# Altium PCB DCDC12180.PcbDoc
Units mm, origin at the board's own origin, x right, y up, seen from the top; angles counter-clockwise.
Board outline 50 x 25 mm, 2 copper layers (Top Layer, Bottom Layer); 19 components, 12 nets, 51 pads, 1 vias.
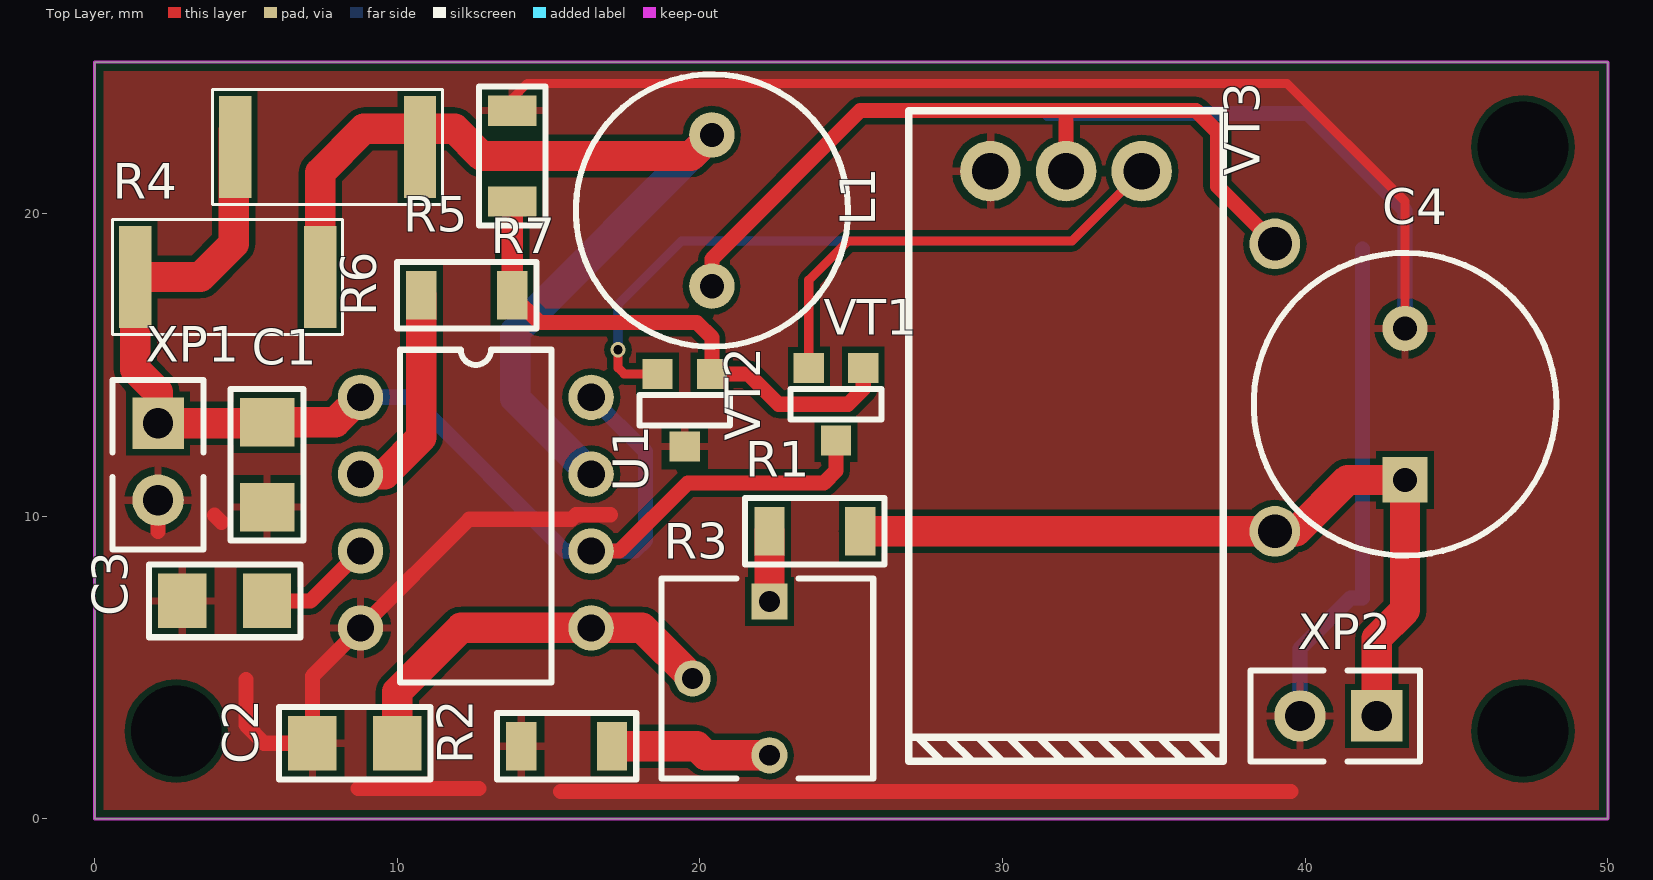
[diagram p0: Top Layer view]
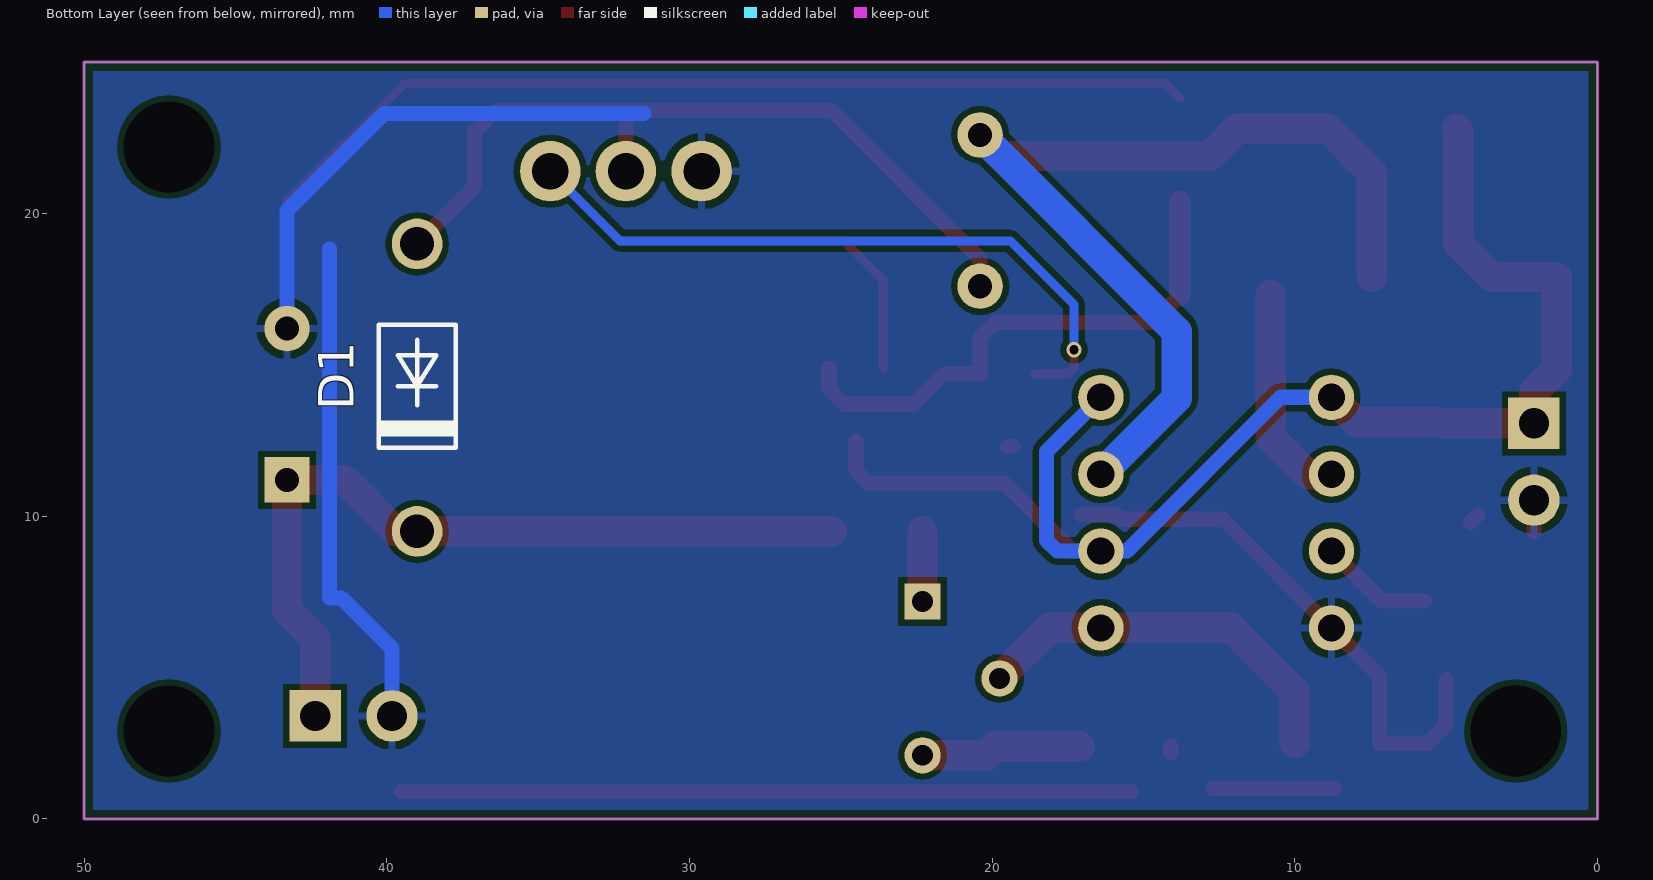
[diagram p1: Bottom Layer view, seen from below]
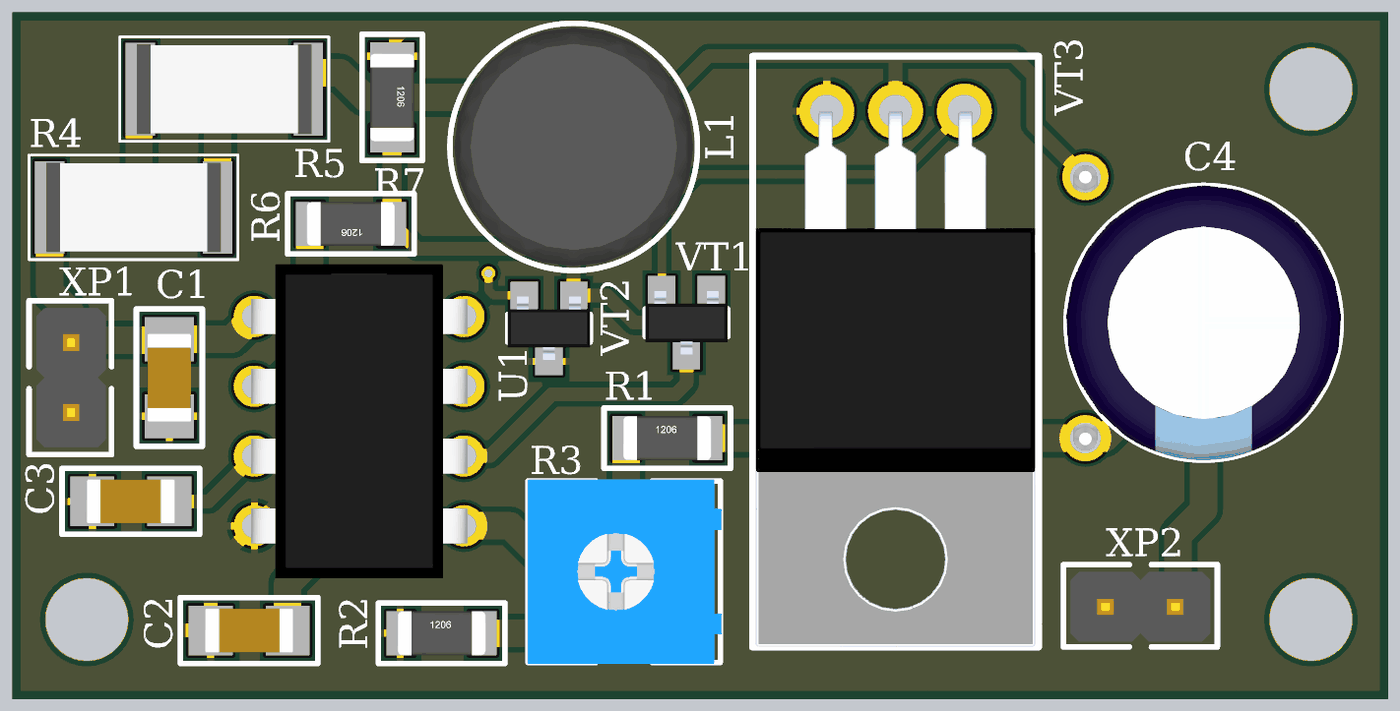
[diagram p2: 3D render of the assembled board from above, using the file's embedded part models]

## Layer stack, top to bottom
Top Solder: solder mask 0.0102, Solder Resist, Dk 3.5
Top Layer: signal copper 0.0356
Dielectric 1: dielectric 0.32, FR-4, Dk 4.8
Bottom Layer: signal copper 0.0356
Bottom Solder: solder mask 0.0102, Solder Resist, Dk 3.5

## Board outline
0,0 50,0 50,25 0,25

## Design rules (kind name [scope] priority, off if disabled: settings)
Clearance [All] p1: gap=0.2 ignorepadtopadclearanceinfootprint=FALSE except(0: Arc-Hole Track-Hole SMDPad-Hole THPad-Hole Via-Hole Fill-Hole Poly-Hole Region-Hole Text-Hole)
PolygonConnect [All] p1: connectstyle=Relief reliefconductorwidth=0.254 reliefentries=4 polygonreliefangle="90 Angle" airgapwidth=0.254
RoutingVias [All] p1: holewidth=0.3 width=0.5 viastyle="Through Hole" minholewidth=0.3 minwidth=0.5 maxholewidth=0.3 maxwidth=0.5
SolderMaskExpansion [All] p1: expansion=0.102
Width [All] p1: maxlimit=1 minlimit=0.2 preferedwidth=0.5
30 further rules are at their usual default settings.

## Components (designator, comment, footprint, x,y, rotation, side; value= is the part's Value field where it differs from the comment)
C1 "0.1u" C1206 5.7,11.7 r90 top
C2 "0.1u" C1206 8.6,2.5 r0 top
C3 "510p" C1206 4.3,7.2 r0 top
C4 "4.7u" ECAP-10x16-5 43.3,13.7 r270 top
D1 "HER107" DO-41 39,14.3 r90 bottom
L1 "100u" "INDUCTOR 0912" 20.4,20.1 r90 top
R1 "1M" R1206 23.8,9.5 r0 top
R2 "4.7k" R1206 15.6,2.4 r0 top
R3 "20k" 3362P 22.235,4.64 r270 top
R4 "0.5" R2512 4.4,17.9 r180 top
R5 "0.5" R2512 7.7,22.2 r180 top
R6 "330" R1206 12.3,17.3 r180 top
R7 "330" R1206 13.8,21.9 r270 top
U1 "MC34063AP1G" DIP8 12.6,10 r270 top
VT1 "BC847" SOT-23 24.5,13.7 r180 top
VT2 "BC857" SOT-23 19.5,13.5 r180 top
VT3 "IRF840" TO-220_HORIZONTAL 32.1,21.4 r180 top
XP1 "+12 В" 2_PIN_INPUT 2.1,11.8 r90 top value=Connector
XP2 "+180 В" 2_PIN_INPUT 41.1,3.4 r0 top value=Connector

## Footprints (in the part's own frame and the unit in brackets; to place one, negate y for a bottom-side part, rotate by r counter-clockwise, add the part's x,y. Pads: shape width x height; smd on the part's side, far side on the other; paste and mask are expansions set on the pad)
2_PIN_INPUT [mm]
  rect 1.7x1.7 hole 1: 1(1.27,0)
  round 1.7 hole 1: 2(-1.27,0)
  silkscreen extent -2.9,-1.5 2.7,1.5, body extent -2.64,-1.3 2.44,1.24, height 6.44
3362P [mm]
  rect 1.198x1.198 hole 0.69: 1(-2.54,0.065)
  round 1.198 hole 0.69: 2(0,-2.475) 3(2.54,0.065)
  silkscreen extent -3.3,-3.49 3.3,3.49, body extent -3.35,-3.5 3.35,3.54, height 5.34
C1206 [mm] "3216M"
  rect 1.6x1.8 smd: 1(-1.4,0) 2(1.4,0)
  silkscreen extent -2.5,-1.2 2.5,1.2, body extent -1.6,-0.8 1.6,0.8, height 1.01
DIP8 [mm]
  round 1.5 hole 0.9: 1(-3.93,-3.81) 2(-1.39,-3.81) 3(1.15,-3.81) 4(3.69,-3.81) 5(3.69,3.81) 6(1.15,3.81) 7(-1.39,3.81) 8(-3.93,3.81)
  silkscreen extent -5.5,-2.5 5.5,2.5, body extent -5.83,-3.94 5.6,3.94, height 4.19
DO-41 [mil]
  round 66 hole 44: A(185.03,-0.01) C(-188.98,0)
  silkscreen extent -80,-50 80,50, body extent -207,-53 202,53, height 111
ECAP-10x16-5 [mm]
  rect 1.5x1.5 hole 0.8: 1(2.5,0)
  round 1.5 hole 0.8: 2(-2.5,0)
  silkscreen extent -5,-5 5,5, body extent -5,-5 5,5, height 17.5
"INDUCTOR 0912" [mm]
  round 1.5 hole 0.8: 1(2.5,0) 2(-2.5,0)
  silkscreen extent -4.5,-4.5 4.5,4.5, body extent -4.35,-4.35 4.35,4.35, height 11
R1206 [mm]
  rect 1x1.6 smd: 1(-1.5,0) 2(1.5,0)
  silkscreen extent -2.3,-1.1 2.3,1.1, body extent -1.6,-0.8 1.6,0.8, height 1
R2512 [mm]
  rect 1.07x3.37 smd: 1(-3.055,0) 2(3.055,0)
  silkscreen extent -3.8,-1.9 3.8,1.9, body extent -3.17,-1.63 3.18,1.63, height 0.58
SOT-23 [mm]
  rect 1x1 smd: 1(-0.9,-1.2) 2(0.9,-1.2) 3(0,1.2)
  silkscreen extent -1.5,-0.5 1.5,0.5, body extent -1.5,-1.15 1.5,1.15, height 1.11
TO-220_HORIZONTAL [mm]
  round 2 hole 1.2: 1(-2.5,0) 2(0,0) 3(2.5,0)
  silkscreen extent -5.2,-2 5.2,19.5, body extent -5.08,0 5.08,19.49, height 4.7

## Part data
C1 C2 C3: library part CAPACITOR, CASE=1206
  C1 C2: URL=https://www.chipdip.ru/product/grm319r71h104k
  C3: URL=https://www.chipdip.ru/product0/508137853
C4: library part CAPACITOR_ECAP
D1: library part DIOD, MODEL=HER107
L1: library part INDUCTOR
R1 R2 R6 R7: library part RESISTOR, CASE=1206
  R1: URL=https://www.chipdip.ru/product0/690816980
  R2: URL=https://www.chipdip.ru/product0/9000079651
  R6 R7: URL=https://www.chipdip.ru/product0/9000079903
R3: library part RESISTOR-VARIABLE, TYPE=3362P, URL=https://www.chipdip.ru/product/3362p-1-203
R4 R5: library part RESISTOR, CASE=2512, URL=https://www.aliexpress.com/item/50Pcs-2512-SMD-chip-fixed-resistor-1-1W-0-1R-0-01R-0-05R-0-001R/32847362977.html?spm=a2g0s.9042311.0.0.274233ed5x5DIN
U1: library part IC-MC34063A, MODEL=MC34063AP1G, URL=https://www.chipdip.ru/product/mc34063ap1g
VT1: library part TRANSISTOR_BC847, MODEL=BC847
VT2: library part TRANSISTOR_BC857, MODEL=BC857
XP1 XP2: library part Con-2-M, Published=07.03.2013, Publisher="Andrew Danich", TYPE=Вилка
VT3: MODEL=IRF840

## Free pads (board coordinates)
  round 1.5 hole 3: ""(2.7,2.9) ""(47.2,2.9) ""(47.2,22.2)

## Via types
v1: diameter 0.5, hole 0.3, Top Layer to Bottom Layer, 1 vias

## Nets (pads, with @x,y where several pads share a name; then routed paths per layer and width w, separated by ;. In a path a pad name is that pad's centre, name@x,y a point inside that pad or via, vN(x,y) a via of type N, cw(c..) or ccw(c..) an arc to the next point about the centre after c; other vN are vias at no path point)
12V: C1.2 R4.2 R5.2 U1.1 U1.6 U1.8 VT1.3 XP1.1 | length 47
  Top Layer w0.5: U1.6 17.35,8.85 19.6,11.1 24.1,11.1 24.5,11.5 VT1.3
  Top Layer w1: R5.2@4.645,22.8 4.6,22.755 4.6,19 3.5,17.9 R4.2 1.345,14.855 2.1,14.1 XP1.1 5.23,13.07 5.26,13.1 C1.2 7.96,13.1 U1.1
  Bottom Layer w0.5: U1.1 10.47,13.93 15.55,8.85 U1.6 17.85,8.85 18.2,9.2 18.2,12.14 U1.8
CI: C2.2 R3.2 U1.5 | length 13
  Top Layer w1: C2.2 10,4.2 12.11,6.31 U1.5 18.09,6.31 R3.2
GND: C1.1 C2.1 C3.1 C4.2 R2.1 R7.1 U1.4 VT2.3 VT3.3 XP1.2 XP2.2 | length 116.7
  Top Layer w0.3: R7.1@13.8,23.8 14.3,24.3 39.4,24.3 43.3,20.4 C4.2
  Top Layer w0.5: 2.1,9.5 XP1.2@2.1,10.03 ; 3.97,10.03 4.2,9.8 ; 5,4.6 5,3.1 5.6,2.5 C2.1 7.2,4.72 U1.4 12.38,9.9 15.763,9.9 15.913,10.05 17.05,10.05 ; 8.7,1 12.7,1 ; R2.1@14.1,2.2 R2.1 ; 15.4,0.9 39.53,0.9 ; VT2.3@19.3,12.3 VT2.3
  Bottom Layer w0.5: 31.5,23.3 40.1,23.3 43.3,20.1 C4.2 ; XP2.2 39.83,5.63 41.5,7.3 41.9,7.3 41.9,18.83
NetC3_2: C3.2 U1.3 | length 3.8
  Top Layer w0.5: C3.2 7.14,7.2 U1.3
NetC4_1: C4.1 D1.C R1.2 XP2.1 | length 26.9
  Top Layer w1: R1.2 D1.C 39.7,9.5 41.4,11.2 C4.1 43.3,6.9 42.37,5.97 XP2.1
NetD1_A: D1.A L1.2 VT3.2 | length 26.4
  Top Layer w0.5: L1.2 20.4,18.5 25.3,23.4 32.1,23.4 ; VT3.2 32.1,23.4 ; D1.A 37.1,20.9 37.1,22.7 36.4,23.4 32.1,23.4
NetL1_1: L1.1 R4.1 R5.1 U1.7 | length 32.6
  Top Layer w1: R4.1 7.455,21.355 8.9,22.8 11.9,22.8 12.8,21.9 19.7,21.9 L1.1
  Bottom Layer w1: U1.7 13.9,13.9 13.9,16.1 L1.1
NetR1_1: R1.1 R3.1 | length 2.3
  Top Layer w1: R3.1 R1.1
NetR2_2: R2.2 R3.3 | length 5.3
  Top Layer w1: R2.2 19.9,2.4 20.2,2.1 R3.3
NetR6_1: R6.1 R7.2 VT1.1 VT2.1 | length 17.8
  Top Layer w0.5: R6.1 14.7,16.4 19.9,16.4 20.4,15.9 VT2.1 21.6,14.7 22.6,13.7 24.9,13.7 25.4,14.2 VT1.1
  Top Layer w0.7: R6.1 R7.2
NetR6_2: R6.2 U1.2 | length 7.2
  Top Layer w1: U1.2 9.59,11.39 10.8,12.6 R6.2
NetVT1_2: VT1.2 VT2.2 VT3.1 | length 38
  Top Layer w0.3: v1(17.3,15.5) 17.3,14.9 17.5,14.7 VT2.2 ; VT1.2 23.6,17.8 24.9,19.1 32.3,19.1 VT3.1
  Bottom Layer w0.3: v1(17.3,15.5) 17.3,17 19.4,19.1 32.3,19.1 VT3.1

## Polygon pours and split planes (outlines as drawn)
GND on Bottom Layer "Bottom Layer-GND" (solid, remove dead copper, pour order 14): 0.3,24.7 49.7,24.7 49.7,0.3 0.3,0.3
GND on Top Layer "TL-GND" (solid, remove dead copper, pour order 16): 0.3,0.3 0.3,24.7 49.7,24.7 49.7,0.3

## Keep-outs
Keep-Out Layer:
  the board outline again, w0.1